# EAGLE board QuietRoom (EAGLE 7.7.0)

Size 100 x 80 mm. Coordinates in mm from the lower left corner, seen from the top.
Outline: 0,0 100,0 100,80 0,80 0,0
Copper layers (1*16): Top 0.035mm / dielectric 1.5mm / Bottom 0.035mm
Design rules "default": minimum track width 10mil, minimum drill 24mil, track to track 8mil, track to pad 8mil, pad to pad 8mil, via to via 8mil, smd to smd 8mil, copper to edge 40mil, drill to drill 8mil, minimum pad ring 10mil, minimum via ring 8mil, stop-mask expansion 4mil, vias tented up to drill 0mil, thermal gap 10mil

## Footprints (pad centres in the part's own frame; a part is rotated, then mirrored left to right if it is on the bottom)
R/2012-12R = smd 1.55 x 1.8: + 1.175,0; - -1.175,0
USB-MINIB = smd 0.5 x 2.308: D+ 0,4.064; D- -0.8,4.064; GND 1.6,4.064; ID 0.8,4.064; VBUS -1.6,4.064 | smd 2 x 2.4: GND1 -4.4,-2; GND2 -4.4,3.5; GND3 4.4,3.5; GND4 4.4,-2 | hole 1: -2.2,1; 2.2,1
SOT223 = smd 1.499 x 2.007: 1 -2.261,-3.15; 2 0.025,-3.15; 3 2.311,-3.15 | smd 3.81 x 2.007: 4 0,3.15
CHIP-LED0805 = smd 1.2 x 1.2: A 0,-1.05; C 0,1.05
R0805 = smd 1.3 x 1.5: 1 -0.95,0; 2 0.95,0
ESP06 = smd 2.5 x 1: ANT -8.4,3.3; CH_PD -8.4,-2.4; GPIO0 8.7,3.3; GPIO2 8.7,0.4; GPIO15 8.7,-2.4; VCC -8.4,0.4 | smd 3 x 3: GND -7.6,6.7; GND1 -7.8,-5.8; GND2 8.1,-5.8; GND3 7.9,6.7 | smd 2 x 2: GND4 -1.1,1.7; GND5 1.5,1.7; GND6 1.5,-0.9; GND7 -1.1,-0.9 | smd 1 x 2.5: GPIO12 0.2,-6.4; GPIO13 2.8,-6.4; GPIO14 -2.4,-6.4; GPIO16 -2.4,7.5; RX 2.8,7.5; TX 0.2,7.5
ANTENNA-CERAMIC = smd 2.54 x 2.184: FEED 4.865,0; NC -4.365,0

## Placement (x,y rotation side)
C1  10uF  [R/2012-12R]  -38.1,26.67 0 top  (outside the outline)
C2  10uF  [R/2012-12R]  -15.24,38.1 0 top  (outside the outline)
CN1  [USB-MINIB]  -19.05,27.94 0 top  (outside the outline)
IC2  REG1117  [SOT223]  -38.1,6.35 0 top  (outside the outline)
LED2  GRN  [CHIP-LED0805]  -21.59,36.83 0 top  (outside the outline)
R2  1K  [R0805]  -33.02,26.67 0 top  (outside the outline)
R3  10K  [R0805]  -27.94,26.67 0 top  (outside the outline)
U$1  ESP06  [ESP06]  -22.86,11.43 0 top  (outside the outline)
U$2  ANT  [ANTENNA-CERAMIC]  -31.75,36.83 0 top  (outside the outline)

## Library data of the parts
C1 C2 = rcl
CN1 = adafruit
IC2 = burr-brown; MPN: LM1117 3v3; OC_FARNELL: 1097566; OC_NEWARK: 14P6981
LED2 = led
R2 R3 = resistor
U$1 = esp8266modules
U$2 = rainsun-ant

## Nets
+3V3: C2.+ IC2.2 LED2.A U$1.CH_PD U$1.VCC
+5V: C1.+ CN1.VBUS IC2.3
GND: C1.- C2.- CN1.GND IC2.1 R2.1 R3.1 U$1.GND6
N$1: R3.2 U$1.GPIO15
N$2: LED2.C R2.2
N$3: U$1.ANT U$2.FEED

## Tracks (layer width: path | path; a pad name or v marks a point on that pad's centre or on a via)
+3V3  (4 unrouted)
+5V  (2 unrouted)
GND  (6 unrouted)
N$1  (1 unrouted)
N$2  (1 unrouted)
N$3  (1 unrouted)